# Altium PCB ObjPoint01-00.PcbDoc
Units mm, origin at the board's own origin, x right, y up, seen from the top; angles counter-clockwise.
Board outline 55 x 89 mm, 2 copper layers (Top Layer, Bottom Layer); 29 components, 30 nets, 103 pads, 0 vias.
Unrouted connection lines stored in the file: 1.
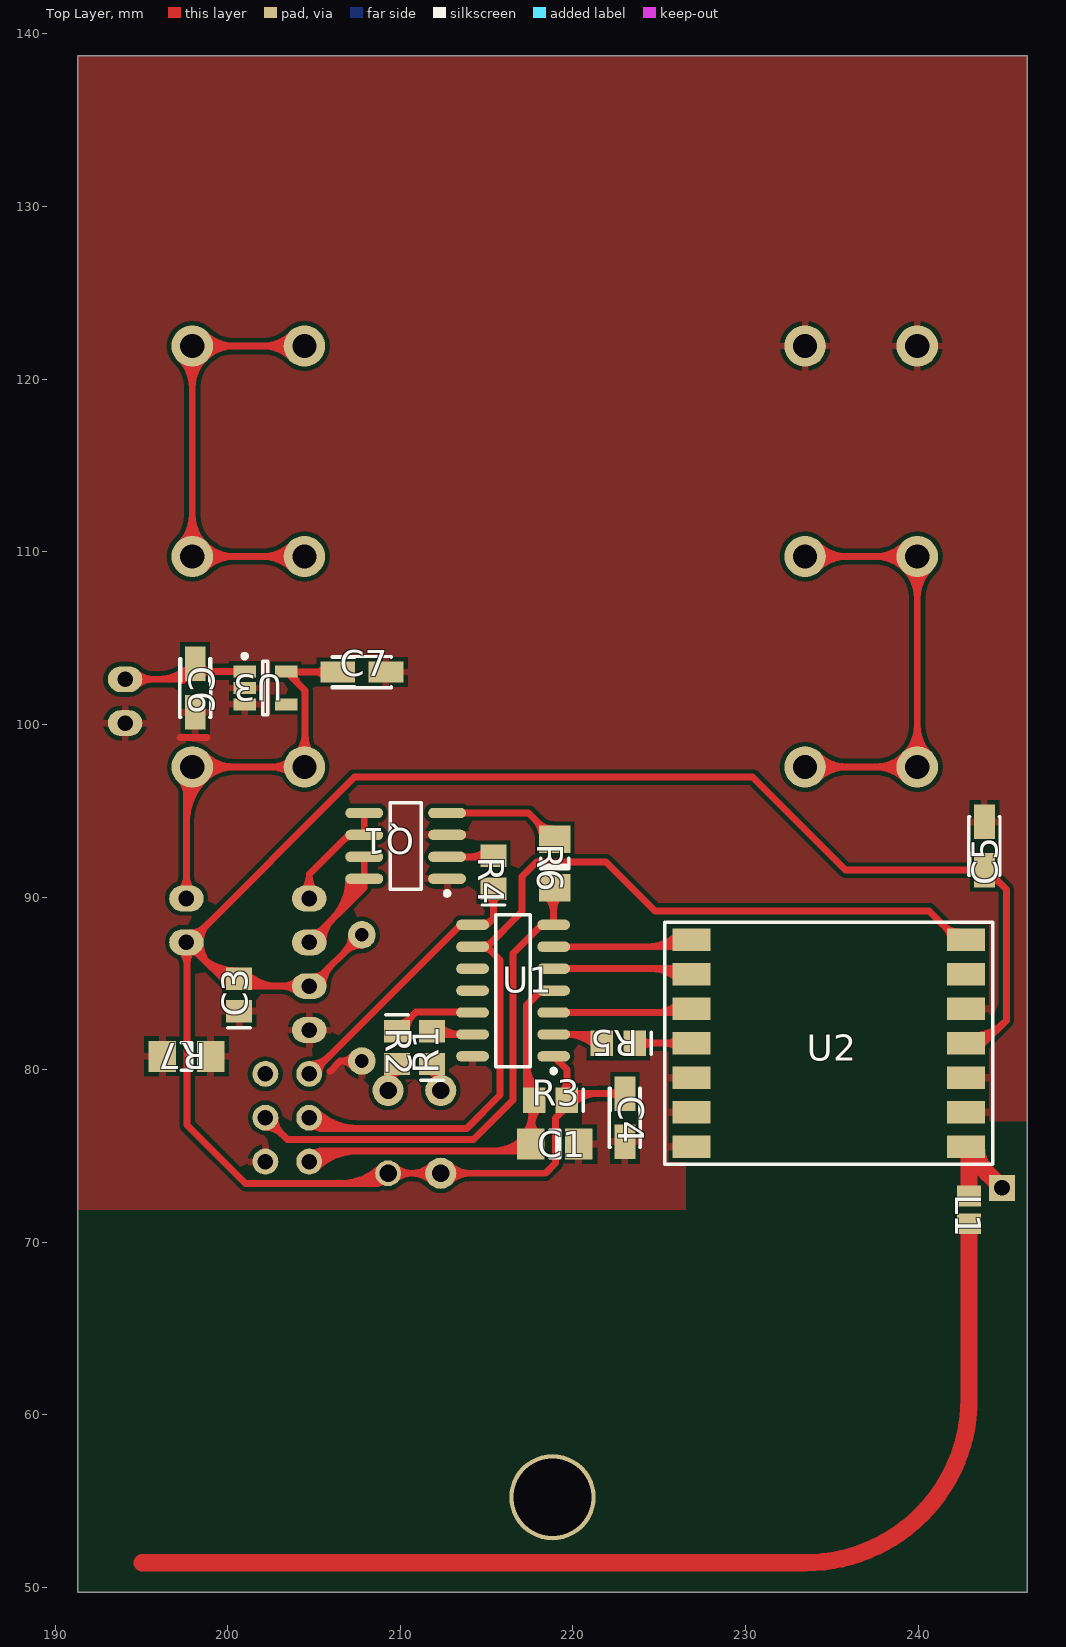
[diagram p0: Top Layer view]
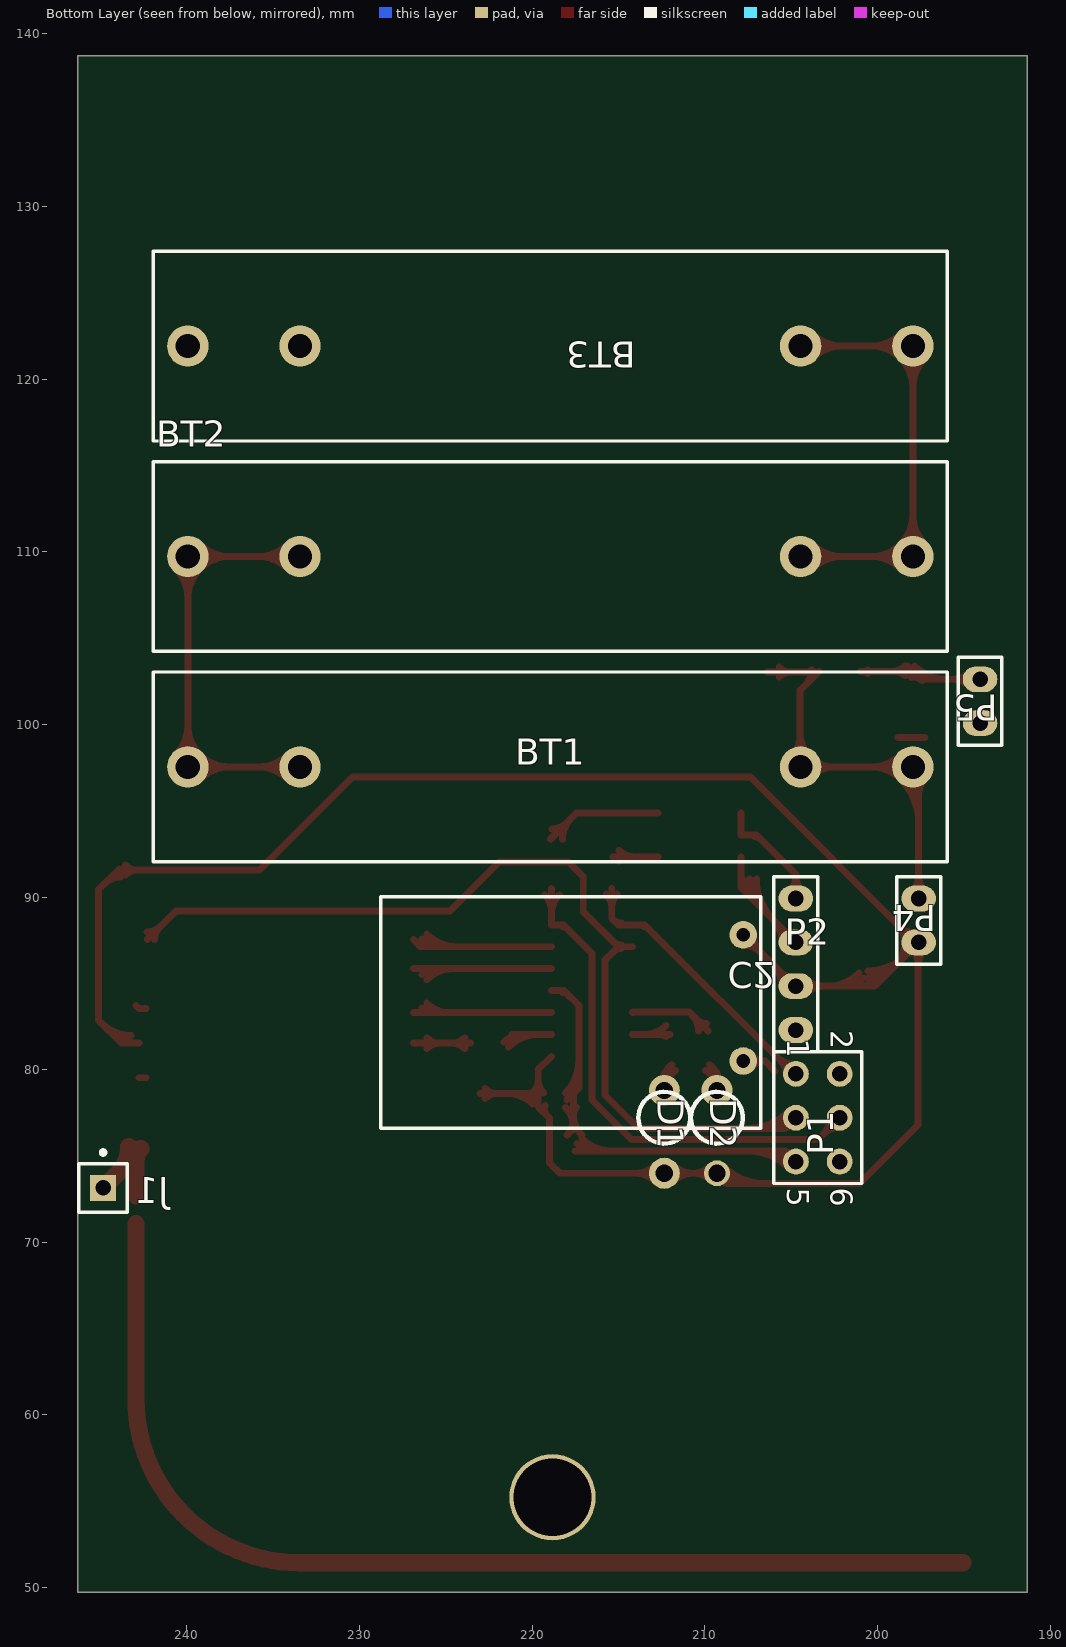
[diagram p1: Bottom Layer view, seen from below]

## Layer stack, top to bottom
Top Solder: solder mask 0.0102, Solder Resist, Dk 3.5
Top Layer: signal copper 0.0356
Dielectric1: dielectric 0.32, FR-4, Dk 4.8
Bottom Layer: signal copper 0.0356
Bottom Solder: solder mask 0.0102, Solder Resist, Dk 3.5

## Board outline
191.32,138.732 191.32,49.732 246.32,49.732 246.32,138.732

## Design rules (kind name [scope] priority, off if disabled: settings)
Clearance [All] p1: gap=0.254
PolygonConnect [All] p1: connectstyle=Relief reliefconductorwidth=0.4 reliefentries=4 polygonreliefangle="90 Angle" airgapwidth=0.254
RoutingVias [All] p1: holewidth=0.711 width=1.27 viastyle="Through Hole" minholewidth=0.711 minwidth=1.27 maxholewidth=0.711 maxwidth=1.27
SilkToSolderMaskClearance SilkscreenOverComponentPads [IsPad] p1: minsilkscreentomaskgap=0.254 clearancetoexposedcopper=TRUE
SolderMaskExpansion [All] p1: expansion=0.102
Width [All] p1: maxlimit=0.4 minlimit=0.4 preferedwidth=0.4
29 further rules are at their usual default settings.

## Components (designator, comment, footprint, x,y, rotation, side; value= is the part's Value field where it differs from the comment)
BT1 "Battery" "AAA Battery Holder" 218.948,97.536 r180 bottom
BT2 "Battery" "AAA Battery Holder" 218.948,109.728 r0 bottom
BT3 "Battery" "AAA Battery Holder" 218.948,121.92 r180 bottom
C1 "SMD Capacitor" 1206 218.948,75.692 r180 top
C2 "Cap" "Capasitor 13.3mm diametras 20.3 aukstis tarp koju 5mm kojos storis 0.6mm" 207.772,83.312 r90 bottom
C3 "Cap" 0805 200.66,84.328 r90 top
C4 "Tantalum SMD Capacitors" A 223.012,77.216 r270 top
C5 "Tantalum SMD Capacitors" A 243.84,92.964 r90 top
C6 "Tantalum SMD Capacitors" A 198.12,102.108 r270 top
C7 "Tantalum SMD Capacitors" A 207.772,103.036 r0 top
D1 "LED" "LED 3mm DIP"#1 212.344,77.216 r270 bottom
D2 "LED" "LED 3mm DIP"#2 209.296,77.216 r270 bottom
J1 "Socket" PIN1 244.856,73.152 r180 bottom
L1 "Inductor" INDC2012L 242.951,71.882 r270 top
P1 "AVR ISP" HDR2X3 204.724,79.756 r270 bottom
P2 "Header 4" HDR1X4 204.724,82.296 r90 bottom
P4 "Header 2" HDR1X2 197.612,89.916 r270 bottom
P5 "Ex. Source" HDR1X2 194.056,102.616 r270 bottom
Q1 "IRF7103" SO-8_N 210.312,92.964 r180 top
R1 "SMD Resistor" 0805 211.836,81.28 r90 top
R2 "SMD Resistor" 0805 209.804,81.28 r270 top
R3 "SMD Resistor" 0805 218.7,78.232 r180 top
R4 "SMD Resistor" 0805 215.392,91.44 r90 top
R5 "SMD Resistor" 0805 222.631,81.534 r180 top
R6 "SMD Resistor" 1206 218.948,91.948 r90 top
R7 "SMD Resistor" 1206 197.612,80.772 r180 top
U1 "ATtiny261A" SOIC14T_L 216.535,84.582 r180 top
U2 "ALPHA-TX" "ALPHA-TX(RFM02) [SMD]" 234.823,81.534 r0 top
U3 "TPS76933" SOT23-5AM 202.184,102.108 r0 top

## Footprints (in the part's own frame and the unit in brackets; to place one, negate y for a bottom-side part, rotate by r counter-clockwise, add the part's x,y. Pads: shape width x height; smd on the part's side, far side on the other; paste and mask are expansions set on the pad)
0805 [mm] "Smd resistor and capacitor; Body 2.0 x 1.2 mm (LxW typ)"
  rect 1.3x1.5 smd: 1(-0.95,0) 2(0.95,0)
  silkscreen extent -1.9,-0.65 -1.9,0.65
1206 [mm] "Smd resistor and capacitor; Body 3.2 x 1.6 mm (LxW typ)"
  rect 1.6x1.8 smd: 1(-1.4,0) 2(1.4,0)
  silkscreen extent -0.3,-0.8 0.3,0.8
A [mm] "Capacitor, SM Tantalum; Body 3.2 x 1.6 mm (LxW typ)"
  rect 2x1.2 smd: 1(-1.4,0) 2(1.4,0)
  silkscreen extent -1.7,-0.9 1.7,0.9
"AAA Battery Holder" [mm]
  round 2.4 hole 1.4: 1(-21,0) 1(-14.5,0) 2(14.5,0) 2(21,0)
  silkscreen extent -23,-5.5 23,5.5
"ALPHA-TX(RFM02) [SMD]" [mm] "ALPHA RF MODULES"
  rect 2.2x1.3 smd: 1(-7.95,6) 2(-7.95,4) 3(-7.95,2) 4(-7.95,0) 5(-7.95,-2) 6(-7.95,-4) 7(-7.95,-6) 8(7.95,6) 9(7.95,4) 10(7.95,2) 11(7.95,0) 12(7.95,-2) 13(7.95,-4) 14(7.95,-6)
  silkscreen extent -9.5,-7 9.5,7
"Capasitor 13.3mm diametras 20.3 aukstis tarp koju 5mm kojos storis 0.6mm" [mm]
  round 1.6 hole 0.8: 1(-2.812,0) 2(4.5,0)
  silkscreen extent -6.7,-1.02 6.7,21
HDR1X2 [mm] "Connector; Header; 2 Position"
  oval 1.5x2 hole 0.9: 1(0,0) 2(2.54,0)
  silkscreen extent -1.27,-1.27 3.81,1.27
HDR1X4 [mm] "Connector; Header; 4 Position"
  oval 1.5x2 hole 0.9: 1(0,0) 2(2.54,0) 3(5.08,0) 4(7.62,0)
  silkscreen extent -1.27,-1.27 8.89,1.27
HDR2X3 [mm] "Connector; Header; 3x2 Position"
  round 1.5 hole 0.9: 1(0,0) 2(0,2.54) 3(2.54,0) 4(2.54,2.54) 5(5.08,0) 6(5.08,2.54)
  silkscreen extent -1.27,-1.27 6.35,3.81
INDC2012L [mm] "Chip Inductor, Body 2.0x1.2mm, IPC High Density"
  rect 1.2x1.4 smd: 1(-0.8,0) 2(0.8,0)
  body extent -1.1,-0.7 1.1,0.7, height 0.55
"LED 3mm DIP"#1 [mm]
  round 1.8 hole 1: 1(3.216,0) 2(-1.584,0)
  silkscreen extent -1.5,-1.5 1.5,1.5
"LED 3mm DIP"#2 [mm]
  round 1.5 hole 1: 1(3.216,0)
  round 1.8 hole 1: 2(-1.584,0)
  silkscreen extent -1.5,-1.5 1.5,1.5
PIN1 [mm] "Connector; Plug"
  rect 1.5x1.5 hole 0.9: 1(0,0)
  silkscreen extent -1.4,-1.4 1.4,2.17
SO-8_N [mm] "SOIC, 8-Leads, Body 4.9x3.9mm, Pitch 1.27mm, IPC Medium Density"
  oval 2.2x0.6 smd: 1(-2.4,1.905) 2(-2.4,0.635) 3(-2.4,-0.635) 4(-2.4,-1.905) 5(2.4,-1.905) 6(2.4,-0.635) 7(2.4,0.635) 8(2.4,1.905)
  silkscreen extent -2.53,-2.5 0.9,2.88, body extent -1.95,-2.45 1.95,2.45, height 1.75
SOIC14T_L [mm] "14-Pin Small Outline Integrated Circuit 1.27 mm Pitch, IPC High Density"
  oval 1.9x0.6 smd: 1(-2.35,3.81) 2(-2.35,2.54) 3(-2.35,1.27) 4(-2.35,0) 5(-2.35,-1.27) 6(-2.35,-2.54) 7(-2.35,-3.81) 8(2.35,-3.81) 9(2.35,-2.54) 10(2.35,-1.27) 11(2.35,0) 12(2.35,1.27) 13(2.35,2.54) 14(2.35,3.81)
  silkscreen extent -2.48,-4.4 1,4.78, body extent -1.95,-4.33 1.95,4.33, height 1.91
SOT23-5AM [mm] "SOT23, 5-Leads, Body 2.9x1.7mm, Pitch 0.95mm, Lead Span 2.8mm, IPC Low Density"
  rect 1.3x0.7 smd: 1(-1.2,0.95) 2(-1.2,0) 3(-1.2,-0.95) 4(1.2,-0.95) 5(1.2,0.95)
  silkscreen extent -1.32,-1.55 0.15,1.97, body extent -0.9,-1.55 0.9,1.55, height 1.45

## Part data
BT1 BT2 BT3: "Multicell Battery"
C1 C4 C5 C6 C7: "Capacitor (Semiconductor SIM Model)"
C2: library part "Tantalum SMD Capacitors", "Capacitor (Semiconductor SIM Model)"
C3: "Capacitor"
D1 D2: library part LED0, "Typical INFRARED GaAs LED"
P1: "Header, 6-Pin"
P2: "Header, 4-Pin"
P4: "Header, 2-Pin"
P5: library part Maitinimas, "Header, 2-Pin"
Q1: "HEXFET Power MOSFET"
R1 R2 R3 R4 R5 R6 R7: "Semiconductor Resistor"
U2: "FM Transmitter Module"
U3: library part TPS769xx, "ULTRALOW-POWER 100-mA LOW-DROPOUT LINEAR REGULATORS"

## Free pads (board coordinates)
  round 5 hole 4.5: 0(218.82,55.232)

## Nets (pads, with @x,y where several pads share a name; then routed paths per layer and width w, separated by ;. In a path a pad name is that pad's centre, name@x,y a point inside that pad or via, vN(x,y) a via of type N, cw(c..) or ccw(c..) an arc to the next point about the centre after c; other vN are vias at no path point)
+4.5V: C2.2 C3.2 C4.1 C5.1 D1.1 D2.1 P2.2 P4.2 R3.1 U1.1 U2.11 | length 168
  Top Layer w0.4: P4.2@197.223,86.987 cw(c196.192,85.956) 197.65,85.956 ; P4.2 200.152,84.836 P2.2 204.796,84.836 C2.2 ; 197.65,86.14 cw(c198.848,86.14) P4.2@198.001,86.987 ; P4.2@197.65,87.376 197.65,76.8 201.044,73.406 208.702,73.406 D2.1 218.4,74 219,74.6 219,77.2 219.65,77.85 R3.1 ; P4.2@197.694,87.294 207.35,96.95 230.4,96.95 235.786,91.564 C5.1@243.906,91.564 ; P4.2@197.862,86.826 cw(c197.862,86.102) 198.374,86.614 ; P4.2@197.862,87.926 ccw(c197.862,89.046) 198.654,88.254 ; P4.2@198.012,87.376 ccw(c198.978,87.376) 198.295,86.693 ; 198.341,86.647 ccw(c200.56,88.866) C3.2@200.56,85.728 ; 198.862,88.462 ccw(c199.947,87.376) 198.412,87.376 ccw(c200.343,87.376) 198.978,86.01 ; 199.024,85.964 ccw(c200.56,87.501) C3.2@200.56,85.328 ; 199.706,85.282 ccw(c200.56,86.135) C3.2@200.56,84.928 ; C3.2@200.795,85.313 ccw(c201.948,86.466) 201.948,84.836 ; C3.2@201.078,85.596 ccw(c202.913,87.431) 202.913,84.836 ; P2.2@204.085,84.447 ccw(c203.146,83.508) 203.146,84.836 ccw(c203.146,86.164) P2.2@204.085,85.225 ; P2.2@204.974,85.386 ccw(c204.974,86.284) 205.609,85.649 ; P2.2@205.524,84.836 cw(c207.282,84.836) 206.039,86.079 ; 206.534,73.406 ccw(c206.534,76.762) D2.1@208.907,74.389 ; C2.2@207.172,87.812 cw(c205.723,87.812) 206.748,86.788 cw(c207.772,85.763) C2.2@207.772,87.212 ; 207.5,73.406 ccw(c207.5,75.796) D2.1@209.19,74.106 ; 208.466,73.406 ccw(c208.466,74.83) D2.1@209.473,73.823 ; D2.1@209.685,73.611 cw(c210.624,72.672) 210.624,74 cw(c210.624,75.328) D2.1@209.685,74.389 ; D1.1@211.849,73.505 ccw(c210.654,72.31) 210.654,74 ccw(c210.654,75.69) D1.1@211.849,74.495 ; D1.1@212.839,73.505 cw(c214.034,72.31) 214.034,74 cw(c214.034,75.69) D1.1@212.839,74.495 ; U1.1 219.65,80.007 R3.1 ; 219.141,77.341 ccw(c218.77,77.712) R3.1@219.244,77.938 ; R3.1@219.332,78.65 ccw(c218.564,79.418) 219.65,79.418 ccw(c220.736,79.418) R3.1@219.968,78.65 ; R3.1@219.685,78.297 cw(c220.456,77.526) 220.456,78.616 ; R3.1@219.898,78.48 R3.1 ; R3.1@219.898,78.752 220.034,78.616 C4.1 ; R3.1@219.968,78.014 cw(c221.422,76.56) 221.422,78.616 ; C4.1@222.729,78.333 ccw(c222.046,77.65) 222.046,78.616 ccw(c222.046,79.582) C4.1@222.729,78.899 ; U2.11 243.784,81.534 245.11,82.86 245.11,90.427 C5.1@243.906,91.63 ; U2.11@243.223,81.584 ccw(c243.223,83.059) 244.266,82.016 ; U2.11@243.223,81.984 ccw(c243.223,84.425) 244.949,82.699 ; C5.1@243.557,91.281 ccw(c242.874,90.598) 242.874,91.564 ccw(c242.874,92.53) C5.1@243.557,91.847 ; C5.1@243.84,91.164 cw(c243.877,89.969) 244.723,90.814
+4.5VS: BT1.2 C7.1 P4.1 U3.5 | length 47.7
  Top Layer w0.4: P4.1@197.223,90.305 ccw(c196.284,91.244) 197.612,91.244 ccw(c198.94,91.244) P4.1@198.001,90.305 ; BT1.2@197.241,96.829 cw(c196.345,95.933) 197.612,95.933 ; P4.1 BT1.2@197.612,97.2 ; 197.612,94.311 cw(c201.173,94.311) 198.655,96.829 cw(c200.362,95.122) 200.362,97.536 cw(c200.362,99.95) BT1.2@198.655,98.243 ; 197.612,95.276 cw(c200.208,95.276) 198.372,97.112 cw(c199.397,96.087) 199.397,97.536 cw(c199.397,98.985) BT1.2@198.372,97.96 ; 197.612,96.242 cw(c199.242,96.242) BT1.2@198.089,97.395 ; BT1.2@197.948,97.536 204.448,97.536 204.488,97.576 204.488,101.954 U3.5@203.406,103.036 ; U3.5 U3.5@203.406,103.036 ; U3.5@203.79,103.164 ccw(c204.099,103.473) 204.099,103.036 ; U3.5@203.834,103.058 ccw(c204.92,103.058) 204.152,102.29 ; BT1.2@203.882,96.97 ccw(c202.517,95.605) 202.517,97.536 ccw(c202.517,99.467) 203.882,98.102 ccw(c202.42,99.564) 204.488,99.564 ; BT1.2@204.165,97.819 ccw(c203.386,98.598) BT1.2@204.488,98.598 ; 204.488,99.371 ccw(c206.283,99.371) BT1.2@205.014,98.102 ; C7.1@205.689,102.753 ccw(c205.006,102.07) 205.006,103.036 ccw(c205.006,104.002) C7.1@205.689,103.319 ; C7.1 U3.5@203.406,103.036
+5V: P1.2
GND: BT3.1 C1.1 C2.1 C3.1 C4.2 C5.2 C6.2 C7.2 P1.6 P2.1 P5.2 Q1.1 Q1.3 R7.1 R7.2 U1.14 U2.5 U2.6 U2.7 U2.10 U2.12 U2.13 U3.2 U3.3 | length 6.5
  Top Layer w0.4: 197.25,99.25 198.8,99.25 ; 205.928,79.908 206.52,80.5 ; C2.1@207.304,80.124 ccw(c206.52,79.494) 206.52,80.5 ; C2.1@207.304,80.876 cw(c206.52,81.506) 206.52,80.5 ; C2.1 206.52,80.5 ; U2.12@242.381,79.534 U2.12 ; U2.10@242.381,83.534 U2.10 U2.10@242.95,83.711
MISO: P1.1 R4.1 U1.8 | length 20.7
  Top Layer w0.4: P1.1@204.724,80.306 ccw(c204.724,81.94) 205.88,80.785 ; P1.1@204.787,79.692 213.487,88.392 U1.8 215.011,88.392 215.392,88.773 R4.1 ; P1.1@205.274,79.756 cw(c206.295,79.756) 205.573,80.478 ; 213.282,88.187 cw(c213.535,87.935) U1.8@213.535,88.292 ; U1.8@214.835,88.492 ccw(c214.835,89.158) 215.306,88.687 ; R4.1@215.074,90.172 cw(c214.306,89.404) 215.392,89.404 cw(c216.478,89.404) R4.1@215.71,90.172
MOSI: P1.4 R6.1 U1.7 | length 34.1
  Top Layer w0.4: P1.4@202.184,76.666 cw(c202.184,75.338) 203.123,76.277 cw(c204.062,77.216) P1.4@202.734,77.216 ; P1.4 203.454,75.946 214.246,75.946 216.535,78.235 216.535,86.741 218.186,88.392 U1.7 R6.1@218.885,90.485 ; 217.981,88.187 cw(c218.235,87.932) U1.7@218.235,88.292 ; R6.1@218.424,90.124 cw(c217.31,89.01) 218.885,89.01 ; 218.885,89.189 cw(c220.207,89.189) R6.1@219.272,90.124
NetBT1_1: BT1.1 BT2.2 | length 61.6
  Top Layer w0.4: BT1.1@233.448,97.536 239.948,97.536 239.948,109.728 BT2.2@233.448,109.728 ; BT1.1@233.872,97.112 cw(c234.897,96.087) 234.897,97.536 cw(c234.897,98.985) BT1.1@233.872,97.96 ; BT2.2@233.872,109.304 cw(c234.897,108.279) 234.897,109.728 cw(c234.897,111.177) BT2.2@233.872,110.152 ; BT1.1@234.155,96.829 cw(c235.862,95.122) 235.862,97.536 cw(c235.862,99.95) BT1.1@234.155,98.243 ; BT2.2@234.155,109.021 cw(c235.862,107.314) 235.862,109.728 cw(c235.862,112.142) BT2.2@234.155,110.435 ; BT1.1@239.241,96.829 ccw(c237.534,95.122) 237.534,97.536 ccw(c237.534,99.95) 239.241,98.243 ccw(c237.534,99.95) 239.948,99.95 ccw(c242.362,99.95) BT1.1@240.655,98.243 ; BT2.2@239.241,110.435 cw(c237.534,112.142) 237.534,109.728 cw(c237.534,107.314) 239.241,109.021 cw(c237.534,107.314) 239.948,107.314 cw(c242.362,107.314) BT2.2@240.655,109.021 ; BT1.1@239.524,97.112 ccw(c238.499,96.087) 238.499,97.536 ccw(c238.499,98.985) 239.524,97.96 ccw(c238.499,98.985) 239.948,98.985 ccw(c241.397,98.985) BT1.1@240.372,97.96 ; BT2.2@239.524,110.152 cw(c238.499,111.177) 238.499,109.728 cw(c238.499,108.279) 239.524,109.304 cw(c238.499,108.279) 239.948,108.279 cw(c241.397,108.279) BT2.2@240.372,109.304
NetBT2_1: BT2.1 BT3.2 | length 61.6
  Top Layer w0.4: BT2.1@197.241,110.435 ccw(c195.534,112.142) 197.948,112.142 ccw(c200.362,112.142) 198.655,110.435 ccw(c200.362,112.142) 200.362,109.728 ccw(c200.362,107.314) BT2.1@198.655,109.021 ; BT3.2@197.241,121.213 cw(c195.534,119.506) 197.948,119.506 cw(c200.362,119.506) 198.655,121.213 cw(c200.362,119.506) 200.362,121.92 cw(c200.362,124.334) BT3.2@198.655,122.627 ; BT2.1@197.524,110.152 ccw(c196.499,111.177) 197.948,111.177 ccw(c199.397,111.177) 198.372,110.152 ccw(c199.397,111.177) 199.397,109.728 ccw(c199.397,108.279) BT2.1@198.372,109.304 ; BT3.2@197.524,121.496 cw(c196.499,120.471) 197.948,120.471 cw(c199.397,120.471) 198.372,121.496 cw(c199.397,120.471) 199.397,121.92 cw(c199.397,123.369) BT3.2@198.372,122.344 ; BT2.1@203.741,109.021 ccw(c202.034,107.314) 202.034,109.728 ccw(c202.034,112.142) BT2.1@203.741,110.435 ; BT3.2@203.741,121.213 ccw(c202.034,119.506) 202.034,121.92 ccw(c202.034,124.334) BT3.2@203.741,122.627 ; BT2.1@204.024,109.304 ccw(c202.999,108.279) 202.999,109.728 ccw(c202.999,111.177) BT2.1@204.024,110.152 ; BT3.2@204.024,121.496 ccw(c202.999,120.471) 202.999,121.92 ccw(c202.999,123.369) BT3.2@204.024,122.344 ; BT2.1@204.448,109.728 197.948,109.728 197.948,121.92 BT3.2@204.448,121.92
NetD1_2: D1.2 R1.1 | length 4.4
  Top Layer w0.4: R1.1@211.69,79.953 cw(c210.904,78.747) D1.2@212.344,78.747 ; R1.1@211.909,80.288 cw(c211.385,79.485) D1.2@212.344,79.485 ; D1.2@212.091,79.453 ccw(c211.948,79.822) R1.1@212.344,79.822 ; D1.2 R1.1@212.344,79.822 ; D1.2@212.597,79.453 cw(c212.74,79.822) R1.1@212.344,79.822
NetD2_2: D2.2 R2.2 | length 4.4
  Top Layer w0.4: D2.2@209.043,79.453 ccw(c208.9,79.822) R2.2@209.296,79.822 ; D2.2@209.296,78.747 cw(c210.736,78.747) R2.2@209.95,79.953 ; D2.2 R2.2@209.296,79.822 ; D2.2@209.296,79.485 cw(c210.255,79.485) R2.2@209.731,80.288 ; D2.2@209.549,79.453 cw(c209.692,79.822) R2.2@209.296,79.822
NetE1_1: L1.2 | length 63.5
  Top Layer w1: 195.05,51.435 233.468,51.435 ccw(c233.468,60.918) 242.951,60.918 L1.2
NetJ1_1: J1.1 L1.1 U2.14 | length 7.8
  Top Layer w1: U2.14@242.667,75.428 cw(c241.981,74.742) 242.951,74.742 ; L1.1 U2.14@242.951,75.057 ; U2.14@242.951,75.356 U2.14@242.951,75.057 ; U2.14@243.373,75.534 ccw(c245.543,75.534) 244.009,73.999 ; J1.1 U2.14@242.951,75.057
NetLS1_1: 
NetP2_3: P2.3 Q1.7 Q1.8 | length 14.8
  Top Layer w0.4: P2.3 207.912,90.564 Q1.8 Q1.7 ; P2.3@204.974,87.926 ccw(c204.974,88.65) 205.486,88.138 ; P2.3@205.124,87.376 cw(c206.09,87.376) 205.407,88.059 ; P2.3@205.524,87.376 cw(c207.455,87.376) 206.09,88.742 ; 206.026,88.678 ccw(c203.644,91.059) Q1.8@207.012,91.059 ; 206.708,89.36 ccw(c205.01,91.059) Q1.8@207.412,91.059 ; 207.391,90.043 ccw(c206.376,91.059) Q1.8@207.812,91.059
NetP2_4: P2.4 Q1.5 Q1.6 | length 9.3
  Top Layer w0.4: P2.4@204.335,90.305 ccw(c203.396,91.244) 204.724,91.244 ccw(c206.052,91.244) P2.4@205.113,90.305 ; P2.4 204.724,91.313 207.01,93.599 Q1.6 Q1.5 ; 206.767,93.356 cw(c207.112,93.011) Q1.6@207.112,93.499
NetP3_1: 
NetP3_2: 
NetP3_3: 
NetQ1_2: Q1.2 R4.2 | length 4.3
  Top Layer w0.4: Q1.2 R4.2@215.331,92.329 ; 214.058,92.329 ccw(c214.058,93.624) R4.2@214.974,92.708 ; 214.353,92.329 cw(c214.353,91.451) R4.2@214.974,92.072
NetQ1_4: Q1.4 R6.2 | length 9.1
  Top Layer w0.4: Q1.4 217.427,94.869 R6.2 ; 217.753,94.543 cw(c216.558,93.348) R6.2@218.248,93.348 ; 217.994,94.302 ccw(c218.848,95.155) R6.2@218.848,93.948
NetR1_2: R1.2 U1.13 | length 3.9
  Top Layer w0.4: R1.2@212.024,82.042 U1.13 ; R1.2@212.254,81.912 cw(c212.569,81.597) R1.2@212.569,82.042 ; R1.2@212.254,82.548 ccw(c213.476,83.77) U1.13@213.476,82.042
NetR2_1: R2.1 U1.12 | length 6.6
  Top Layer w0.4: R2.1 209.804,82.24 210.898,83.334 214.163,83.334 U1.12 ; R2.1@209.904,82.68 ccw(c209.904,83.501) 210.484,82.92 ; R2.1@210.354,82.23 cw(c211.706,82.23) 210.75,83.186
NetR5_1: R5.1 U2.4 | length 6.7
  Top Layer w0.4: R5.1 U2.4 ; R5.1@223.899,81.216 cw(c224.667,80.448) 224.667,81.534 cw(c224.667,82.62) R5.1@223.899,81.852 ; U2.4@226.105,81.216 ccw(c225.337,80.448) 225.337,81.534 ccw(c225.337,82.62) U2.4@226.105,81.852
NetR5_2: R5.2 U1.2 | length 5.4
  Top Layer w0.4: U1.2 R5.2@221.173,82.042 ; U1.2@219.61,82.042 cw(c219.61,79.563) R5.2@221.363,81.316 ; 220.575,82.042 cw(c220.575,80.528) R5.2@221.646,81.599
NIRQ: P1.3 U1.9 U2.8 | length 62.8
  Top Layer w0.4: P1.3@204.547,77.039 ccw(c205.608,78.1) 205.608,76.6 ; P1.3 205.34,76.6 213.85,76.6 215.773,78.523 215.773,86.36 U1.9@215.011,87.122 ; P1.3@204.83,77.322 ccw(c206.573,79.065) 206.573,76.6 ; P1.3@205.113,77.605 ccw(c207.539,80.031) 207.539,76.6 ; U1.9 U1.9@215.011,87.122 ; U1.9@214.835,87.022 cw(c214.835,86.356) 215.306,86.827 ; U1.9@214.835,87.222 ccw(c214.835,87.888) 215.306,87.417 ; 241.516,88.318 ccw(c242.323,89.126) U2.8@242.323,87.984 ; 241.571,88.263 cw(c240.842,87.534) U2.8@241.873,87.534 ; U2.8@242.3,87.534 240.634,89.2 224.75,89.2 221.914,92.036 217.893,92.036 217.043,91.186 217.043,89.154 U1.9@215.011,87.122
NSEL: U1.3 U2.3 | length 10.1
  Top Layer w0.4: U1.3 U2.3@226.873,83.312 ; 224.801,83.312 ccw(c224.801,85.156) U2.3@226.105,83.852 ; 225.766,83.312 ccw(c225.766,84.191) U2.3@226.388,83.569
RST: C1.2 P1.5 R3.2 U1.4 | length 39.4
  Top Layer w0.4: P1.5@204.547,74.853 cw(c205.608,73.792) 205.608,75.292 ; P1.5 205.34,75.292 C1.2@217.529,75.292 ; P1.5@204.83,74.57 cw(c206.573,72.827) 206.573,75.292 ; P1.5@205.113,74.287 cw(c207.539,71.861) 207.539,75.292 ; 215.375,75.292 ccw(c215.375,77.765) C1.2@217.124,76.016 ; 216.341,75.292 ccw(c216.341,76.799) C1.2@217.407,75.733 ; C1.2@217.124,76.216 ccw(c215.933,77.407) 217.617,77.407 ; 217.297,79.546 ccw(c218.964,79.546) R3.2@217.785,78.367 ; 217.297,80.512 ccw(c219.93,80.512) R3.2@218.068,78.65 ; R3.2@217.432,77.814 cw(c216.985,77.367) 217.617,77.367 ; C1.2@217.617,76.512 R3.2@217.617,78.486 ; 217.617,76.725 cw(c219.157,76.725) R3.2@218.068,77.814 ; 217.617,77.074 ccw(c218.83,77.074) C1.2@217.972,76.216 ; 217.953,84.365 cw(c218.235,84.084) U1.4@218.235,84.482 ; R3.2@217.998,78.232 217.297,78.933 217.297,83.709 218.17,84.582 U1.4
SCK_RF: U1.5 U2.2 | length 10.6
  Top Layer w0.4: U1.5 U2.2@226.873,85.852 ; 224.569,85.852 cw(c224.569,83.68) U2.2@226.105,85.216 ; 225.535,85.852 cw(c225.535,84.646) U2.2@226.388,85.499
SDI: U1.6 U2.1 | length 11.3
  Top Layer w0.4: U1.6 226.461,87.122 U2.1 ; 224.342,87.122 ccw(c224.342,89.615) U2.1@226.105,87.852 ; 225.308,87.122 ccw(c225.308,88.649) U2.1@226.388,87.569
VC: C6.1 P5.1 U3.1 | length 16.6
  Top Layer w0.4: P5.1@193.548,102.616 P5.1 197.471,102.616 198.241,103.387 198.57,103.058 U3.1 ; P5.1@194.695,102.227 cw(c195.634,101.288) 195.634,102.616 cw(c195.634,103.944) P5.1@194.695,103.005 ; 195.967,102.616 ccw(c195.967,105.261) C6.1@197.837,103.391 ; 196.932,102.616 ccw(c196.932,104.296) C6.1@198.12,103.108 ; 197.392,102.537 cw(c197.873,102.057) C6.1@198.029,102.719 ; C6.1@197.548,102.693 ccw(c197.134,103.108) C6.1@197.72,103.108 ; C6.1@198.403,102.825 cw(c198.965,102.263) 198.965,103.058 ; C6.1@198.403,103.391 ccw(c199.206,104.194) 199.206,103.058 ; U3.1@200.578,102.952 ccw(c200.322,102.696) 200.322,103.058 ccw(c200.322,103.42) U3.1@200.578,103.164
pads on no net: U1.10 U1.11 U2.9 U3.4

## Polygon pours and split planes (outlines as drawn)
GND on Top Layer "Top Layer-No Net" (solid, remove dead copper, pour order 4): 241.644,89.239 241.644,77.114 241.7,77.054 241.75,77 246.3,77 246.3,89.25
GND on Top Layer "Top Layer-No Net" (solid, remove dead copper, pour order 2): 191.32,138.732 246.32,138.732 246.32,87.9 191.32,87.9
GND on Top Layer "Top Layer-No Net" (solid, remove dead copper, pour order 0): 226.55,71.9 191.32,71.9 191.32,91.764 226.55,91.764

## Dimensions
246.32,138.732 to 241.948,127.42 on Top Overlay
246.32,49.732 to 246.32,138.732 on Top Overlay
191.32,49.732 to 246.32,49.732 on Top Overlay
218.82,55.232 to 191.32,49.732 on Top Overlay
218.82,55.232 to 191.32,49.732 on Top Overlay

## Text inside footprints (layer, text, board x,y; h text height)
P1: Bottom Overlay "6" at 202.692,73.152 h1.27 r90; Bottom Overlay "5" at 205.232,73.152 h1.27 r90; Bottom Overlay "2" at 202.692,82.296 h1.27 r90; Bottom Overlay "1" at 205.232,81.788 h1.27 r90